# EAGLE board csew_layout_test (EAGLE 7.3.0)
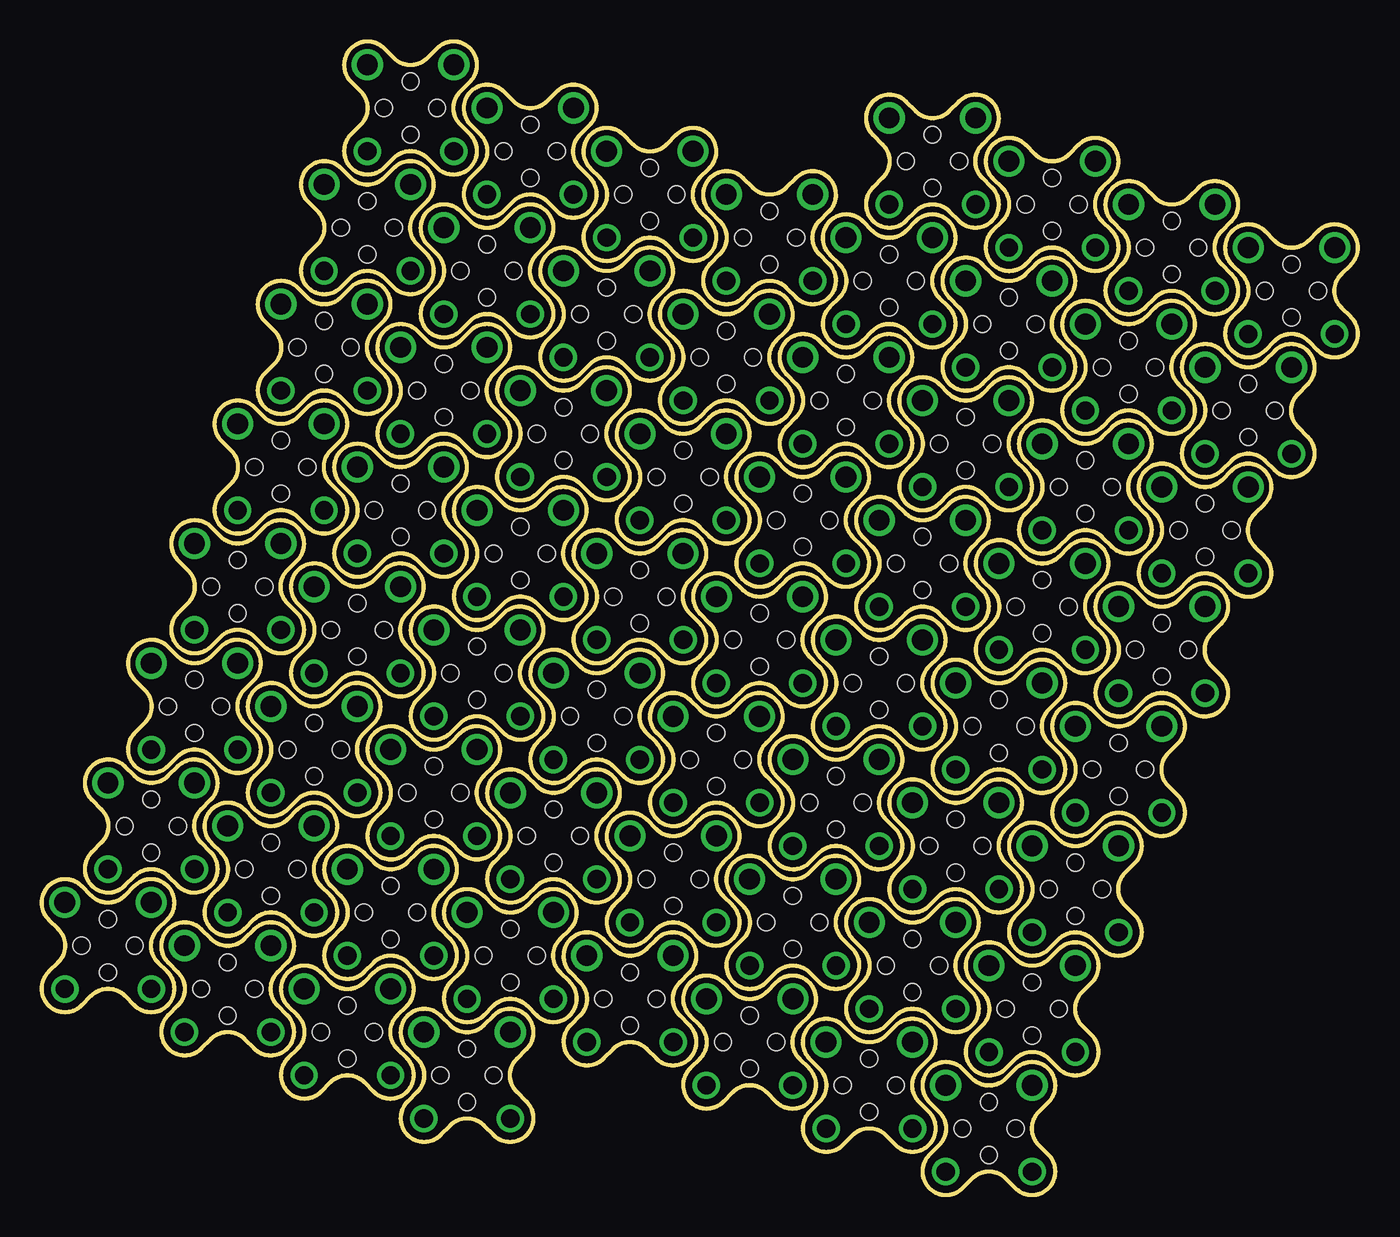
[diagram p0: board, top side]

Size 79.2 x 69.4 mm. Coordinates in mm from the lower left corner, seen from the top.
Outline: 2048 segments
Copper layers (1*16): Top 0.035mm / dielectric 1.5mm / Bottom 0.035mm
Design rules "default": minimum track width 10mil, minimum drill 24mil, track to track 8mil, track to pad 8mil, pad to pad 8mil, via to via 8mil, smd to smd 8mil, copper to edge 40mil, drill to drill 8mil, minimum pad ring 10mil, minimum via ring 8mil, stop-mask expansion 4mil, vias tented up to drill 0mil, thermal gap 10mil
Holes 1 mm at 2.4,15 5.6,15 4,16.6 4,13.4 5,22.2 8.2,22.2 6.6,23.8 6.6,20.6 9.6,12.4 12.8,12.4 11.2,14 11.2,10.8 12.2,19.6 15.4,19.6 13.8,21.2 13.8,18 7.6,29.4 10.8,29.4 9.2,31 9.2,27.8 10.2,36.6 13.4,36.6 11.8,38.2 11.8,35 14.8,26.8 18,26.8 16.4,28.4 16.4,25.2 17.4,34 20.6,34 19,35.6 19,32.4 12.8,43.8 16,43.8 14.4,45.4 14.4,42.2 15.4,51 18.6,51 17,52.6 17,49.4 20,41.2 23.2,41.2 21.6,42.8 21.6,39.6 22.6,48.4 25.8,48.4 24.2,50 24.2,46.8 18,58.2 21.2,58.2 19.6,59.8 19.6,56.6 20.6,65.4 23.8,65.4 22.2,67 22.2,63.8 25.2,55.6 28.4,55.6 26.8,57.2 26.8,54 27.8,62.8 31,62.8 29.4,64.4 29.4,61.2 16.8,9.8 20,9.8 18.4,11.4 18.4,8.2 19.4,17 22.6,17 21,18.6 21,15.4 24,7.2 27.2,7.2 25.6,8.8 25.6,5.6 26.6,14.4 29.8,14.4 28.2,16 28.2,12.8 22,24.2 25.2,24.2 23.6,25.8 23.6,22.6 24.6,31.4 27.8,31.4 26.2,33 26.2,29.8 29.2,21.6 32.4,21.6 30.8,23.2 30.8,20 31.8,28.8 35,28.8 33.4,30.4 33.4,27.2 27.2,38.6 30.4,38.6 28.8,40.2 28.8,37 29.8,45.8 33,45.8 31.4,47.4 31.4,44.2 34.4,36 37.6,36 36,37.6 36,34.4 37,43.2 40.2,43.2 38.6,44.8 38.6,41.6 32.4,53 35.6,53 34,54.6 34,51.4 35,60.2 38.2,60.2 36.6,61.8 36.6,58.6 39.6,50.4 42.8,50.4 41.2,52 41.2,48.8 42.2,57.6 45.4,57.6 43.8,59.2 43.8,56 33.8,11.8 37,11.8 35.4,13.4 35.4,10.2 36.4,19 39.6,19 38,20.6 38,17.4 41,9.2 44.2,9.2 42.6,10.8 42.6,7.6 43.6,16.4 46.8,16.4 45.2,18 45.2,14.8 39,26.2 42.2,26.2 40.6,27.8 40.6,24.6 41.6,33.4 44.8,33.4 43.2,35 43.2,31.8 46.2,23.6 49.4,23.6 47.8,25.2 47.8,22 48.8,30.8 52,30.8 50.4,32.4 50.4,29.2 44.2,40.6 47.4,40.6 45.8,42.2 45.8,39 46.8,47.8 50,47.8 48.4,49.4 48.4,46.2 51.4,38 54.6,38 53,39.6 53,36.4 54,45.2 57.2,45.2 55.6,46.8 55.6,43.6 49.4,55 52.6,55 51,56.6 51,53.4 52,62.2 55.2,62.2 53.6,63.8 53.6,60.6 56.6,52.4 59.8,52.4 58.2,54 58.2,50.8 59.2,59.6 62.4,59.6 60.8,61.2 60.8,58 48.2,6.6 51.4,6.6 49.8,8.2 49.8,5 50.8,13.8 54,13.8 52.4,15.4 52.4,12.2 55.4,4 58.6,4 57,5.6 57,2.4 58,11.2 61.2,11.2 59.6,12.8 59.6,9.6 53.4,21 56.6,21 55,22.6 55,19.4 56,28.2 59.2,28.2 57.6,29.8 57.6,26.6 60.6,18.4 63.8,18.4 62.2,20 62.2,16.8 63.2,25.6 66.4,25.6 64.8,27.2 64.8,24 58.6,35.4 61.8,35.4 60.2,37 60.2,33.8 61.2,42.6 64.4,42.6 62.8,44.2 62.8,41 65.8,32.8 69,32.8 67.4,34.4 67.4,31.2 68.4,40 71.6,40 70,41.6 70,38.4 63.8,49.8 67,49.8 65.4,51.4 65.4,48.2 66.4,57 69.6,57 68,58.6 68,55.4 71,47.2 74.2,47.2 72.6,48.8 72.6,45.6 73.6,54.4 76.8,54.4 75.2,56 75.2,52.8

## Footprints (pad centres in the part's own frame; a part is rotated, then mirrored left to right if it is on the bottom)
SML0603 = smd 0.8 x 0.8: A 0.75,0; C -0.75,0

## Placement (x,y rotation side)
LED1  [SML0603]  98,93 0 top  (outside the outline)
LED2  [SML0603]  95,91 0 top  (outside the outline)

## Library data of the parts
LED1 LED2 = led

## Tracks (layer width: path | path; a pad name or v marks a point on that pad's centre or on a via)
N$1  (via drill 1.25 pad 1.5)
  other vias: 1.4,17.6
N$2  (via drill 1.25 pad 1.5)
  other vias: 6.6,17.6
N$3  (via drill 1.1 pad 1.5)
  other vias: 1.4,12.4
N$4  (via drill 1.1 pad 1.5)
  other vias: 6.6,12.4
N$5  (via drill 1.25 pad 1.5)
  other vias: 4,24.8
N$6  (via drill 1.25 pad 1.5)
  other vias: 9.2,24.8
N$7  (via drill 1.1 pad 1.5)
  other vias: 4,19.6
N$8  (via drill 1.1 pad 1.5)
  other vias: 9.2,19.6
N$9  (via drill 1.25 pad 1.5)
  other vias: 8.6,15
N$10  (via drill 1.25 pad 1.5)
  other vias: 13.8,15
N$11  (via drill 1.1 pad 1.5)
  other vias: 8.6,9.8
N$12  (via drill 1.1 pad 1.5)
  other vias: 13.8,9.8
N$13  (via drill 1.25 pad 1.5)
  other vias: 11.2,22.2
N$14  (via drill 1.25 pad 1.5)
  other vias: 16.4,22.2
N$15  (via drill 1.1 pad 1.5)
  other vias: 11.2,17
N$16  (via drill 1.1 pad 1.5)
  other vias: 16.4,17
N$17  (via drill 1.25 pad 1.5)
  other vias: 6.6,32
N$18  (via drill 1.25 pad 1.5)
  other vias: 11.8,32
N$19  (via drill 1.1 pad 1.5)
  other vias: 6.6,26.8
N$20  (via drill 1.1 pad 1.5)
  other vias: 11.8,26.8
N$21  (via drill 1.25 pad 1.5)
  other vias: 9.2,39.2
N$22  (via drill 1.25 pad 1.5)
  other vias: 14.4,39.2
N$23  (via drill 1.1 pad 1.5)
  other vias: 9.2,34
N$24  (via drill 1.1 pad 1.5)
  other vias: 14.4,34
N$25  (via drill 1.25 pad 1.5)
  other vias: 13.8,29.4
N$26  (via drill 1.25 pad 1.5)
  other vias: 19,29.4
N$27  (via drill 1.1 pad 1.5)
  other vias: 13.8,24.2
N$28  (via drill 1.1 pad 1.5)
  other vias: 19,24.2
N$29  (via drill 1.25 pad 1.5)
  other vias: 16.4,36.6
N$30  (via drill 1.25 pad 1.5)
  other vias: 21.6,36.6
N$31  (via drill 1.1 pad 1.5)
  other vias: 16.4,31.4
N$32  (via drill 1.1 pad 1.5)
  other vias: 21.6,31.4
N$33  (via drill 1.25 pad 1.5)
  other vias: 11.8,46.4
N$34  (via drill 1.25 pad 1.5)
  other vias: 17,46.4
N$35  (via drill 1.1 pad 1.5)
  other vias: 11.8,41.2
N$36  (via drill 1.1 pad 1.5)
  other vias: 17,41.2
N$37  (via drill 1.25 pad 1.5)
  other vias: 14.4,53.6
N$38  (via drill 1.25 pad 1.5)
  other vias: 19.6,53.6
N$39  (via drill 1.1 pad 1.5)
  other vias: 14.4,48.4
N$40  (via drill 1.1 pad 1.5)
  other vias: 19.6,48.4
N$41  (via drill 1.25 pad 1.5)
  other vias: 19,43.8
N$42  (via drill 1.25 pad 1.5)
  other vias: 24.2,43.8
N$43  (via drill 1.1 pad 1.5)
  other vias: 19,38.6
N$44  (via drill 1.1 pad 1.5)
  other vias: 24.2,38.6
N$45  (via drill 1.25 pad 1.5)
  other vias: 21.6,51
N$46  (via drill 1.25 pad 1.5)
  other vias: 26.8,51
N$47  (via drill 1.1 pad 1.5)
  other vias: 21.6,45.8
N$48  (via drill 1.1 pad 1.5)
  other vias: 26.8,45.8
N$49  (via drill 1.25 pad 1.5)
  other vias: 17,60.8
N$50  (via drill 1.25 pad 1.5)
  other vias: 22.2,60.8
N$51  (via drill 1.1 pad 1.5)
  other vias: 17,55.6
N$52  (via drill 1.1 pad 1.5)
  other vias: 22.2,55.6
N$53  (via drill 1.25 pad 1.5)
  other vias: 19.6,68
N$54  (via drill 1.25 pad 1.5)
  other vias: 24.8,68
N$55  (via drill 1.1 pad 1.5)
  other vias: 19.6,62.8
N$56  (via drill 1.1 pad 1.5)
  other vias: 24.8,62.8
N$57  (via drill 1.25 pad 1.5)
  other vias: 24.2,58.2
N$58  (via drill 1.25 pad 1.5)
  other vias: 29.4,58.2
N$59  (via drill 1.1 pad 1.5)
  other vias: 24.2,53
N$60  (via drill 1.1 pad 1.5)
  other vias: 29.4,53
N$61  (via drill 1.25 pad 1.5)
  other vias: 26.8,65.4
N$62  (via drill 1.25 pad 1.5)
  other vias: 32,65.4
N$63  (via drill 1.1 pad 1.5)
  other vias: 26.8,60.2
N$64  (via drill 1.1 pad 1.5)
  other vias: 32,60.2
N$65  (via drill 1.25 pad 1.5)
  other vias: 15.8,12.4
N$66  (via drill 1.25 pad 1.5)
  other vias: 21,12.4
N$67  (via drill 1.1 pad 1.5)
  other vias: 15.8,7.2
N$68  (via drill 1.1 pad 1.5)
  other vias: 21,7.2
N$69  (via drill 1.25 pad 1.5)
  other vias: 18.4,19.6
N$70  (via drill 1.25 pad 1.5)
  other vias: 23.6,19.6
N$71  (via drill 1.1 pad 1.5)
  other vias: 18.4,14.4
N$72  (via drill 1.1 pad 1.5)
  other vias: 23.6,14.4
N$73  (via drill 1.25 pad 1.5)
  other vias: 23,9.8
N$74  (via drill 1.25 pad 1.5)
  other vias: 28.2,9.8
N$75  (via drill 1.1 pad 1.5)
  other vias: 23,4.6
N$76  (via drill 1.1 pad 1.5)
  other vias: 28.2,4.6
N$77  (via drill 1.25 pad 1.5)
  other vias: 25.6,17
N$78  (via drill 1.25 pad 1.5)
  other vias: 30.8,17
N$79  (via drill 1.1 pad 1.5)
  other vias: 25.6,11.8
N$80  (via drill 1.1 pad 1.5)
  other vias: 30.8,11.8
N$81  (via drill 1.25 pad 1.5)
  other vias: 21,26.8
N$82  (via drill 1.25 pad 1.5)
  other vias: 26.2,26.8
N$83  (via drill 1.1 pad 1.5)
  other vias: 21,21.6
N$84  (via drill 1.1 pad 1.5)
  other vias: 26.2,21.6
N$85  (via drill 1.25 pad 1.5)
  other vias: 23.6,34
N$86  (via drill 1.25 pad 1.5)
  other vias: 28.8,34
N$87  (via drill 1.1 pad 1.5)
  other vias: 23.6,28.8
N$88  (via drill 1.1 pad 1.5)
  other vias: 28.8,28.8
N$89  (via drill 1.25 pad 1.5)
  other vias: 28.2,24.2
N$90  (via drill 1.25 pad 1.5)
  other vias: 33.4,24.2
N$91  (via drill 1.1 pad 1.5)
  other vias: 28.2,19
N$92  (via drill 1.1 pad 1.5)
  other vias: 33.4,19
N$93  (via drill 1.25 pad 1.5)
  other vias: 30.8,31.4
N$94  (via drill 1.25 pad 1.5)
  other vias: 36,31.4
N$95  (via drill 1.1 pad 1.5)
  other vias: 30.8,26.2
N$96  (via drill 1.1 pad 1.5)
  other vias: 36,26.2
N$97  (via drill 1.25 pad 1.5)
  other vias: 26.2,41.2
N$98  (via drill 1.25 pad 1.5)
  other vias: 31.4,41.2
N$99  (via drill 1.1 pad 1.5)
  other vias: 26.2,36
N$100  (via drill 1.1 pad 1.5)
  other vias: 31.4,36
N$101  (via drill 1.25 pad 1.5)
  other vias: 28.8,48.4
N$102  (via drill 1.25 pad 1.5)
  other vias: 34,48.4
N$103  (via drill 1.1 pad 1.5)
  other vias: 28.8,43.2
N$104  (via drill 1.1 pad 1.5)
  other vias: 34,43.2
N$105  (via drill 1.25 pad 1.5)
  other vias: 33.4,38.6
N$106  (via drill 1.25 pad 1.5)
  other vias: 38.6,38.6
N$107  (via drill 1.1 pad 1.5)
  other vias: 33.4,33.4
N$108  (via drill 1.1 pad 1.5)
  other vias: 38.6,33.4
N$109  (via drill 1.25 pad 1.5)
  other vias: 36,45.8
N$110  (via drill 1.25 pad 1.5)
  other vias: 41.2,45.8
N$111  (via drill 1.1 pad 1.5)
  other vias: 36,40.6
N$112  (via drill 1.1 pad 1.5)
  other vias: 41.2,40.6
N$113  (via drill 1.25 pad 1.5)
  other vias: 31.4,55.6
N$114  (via drill 1.25 pad 1.5)
  other vias: 36.6,55.6
N$115  (via drill 1.1 pad 1.5)
  other vias: 31.4,50.4
N$116  (via drill 1.1 pad 1.5)
  other vias: 36.6,50.4
N$117  (via drill 1.25 pad 1.5)
  other vias: 34,62.8
N$118  (via drill 1.25 pad 1.5)
  other vias: 39.2,62.8
N$119  (via drill 1.1 pad 1.5)
  other vias: 34,57.6
N$120  (via drill 1.1 pad 1.5)
  other vias: 39.2,57.6
N$121  (via drill 1.25 pad 1.5)
  other vias: 38.6,53
N$122  (via drill 1.25 pad 1.5)
  other vias: 43.8,53
N$123  (via drill 1.1 pad 1.5)
  other vias: 38.6,47.8
N$124  (via drill 1.1 pad 1.5)
  other vias: 43.8,47.8
N$125  (via drill 1.25 pad 1.5)
  other vias: 41.2,60.2
N$126  (via drill 1.25 pad 1.5)
  other vias: 46.4,60.2
N$127  (via drill 1.1 pad 1.5)
  other vias: 41.2,55
N$128  (via drill 1.1 pad 1.5)
  other vias: 46.4,55
N$129  (via drill 1.25 pad 1.5)
  other vias: 32.8,14.4
N$130  (via drill 1.25 pad 1.5)
  other vias: 38,14.4
N$131  (via drill 1.1 pad 1.5)
  other vias: 32.8,9.2
N$132  (via drill 1.1 pad 1.5)
  other vias: 38,9.2
N$133  (via drill 1.25 pad 1.5)
  other vias: 35.4,21.6
N$134  (via drill 1.25 pad 1.5)
  other vias: 40.6,21.6
N$135  (via drill 1.1 pad 1.5)
  other vias: 35.4,16.4
N$136  (via drill 1.1 pad 1.5)
  other vias: 40.6,16.4
N$137  (via drill 1.25 pad 1.5)
  other vias: 40,11.8
N$138  (via drill 1.25 pad 1.5)
  other vias: 45.2,11.8
N$139  (via drill 1.1 pad 1.5)
  other vias: 40,6.6
N$140  (via drill 1.1 pad 1.5)
  other vias: 45.2,6.6
N$141  (via drill 1.25 pad 1.5)
  other vias: 42.6,19
N$142  (via drill 1.25 pad 1.5)
  other vias: 47.8,19
N$143  (via drill 1.1 pad 1.5)
  other vias: 42.6,13.8
N$144  (via drill 1.1 pad 1.5)
  other vias: 47.8,13.8
N$145  (via drill 1.25 pad 1.5)
  other vias: 38,28.8
N$146  (via drill 1.25 pad 1.5)
  other vias: 43.2,28.8
N$147  (via drill 1.1 pad 1.5)
  other vias: 38,23.6
N$148  (via drill 1.1 pad 1.5)
  other vias: 43.2,23.6
N$149  (via drill 1.25 pad 1.5)
  other vias: 40.6,36
N$150  (via drill 1.25 pad 1.5)
  other vias: 45.8,36
N$151  (via drill 1.1 pad 1.5)
  other vias: 40.6,30.8
N$152  (via drill 1.1 pad 1.5)
  other vias: 45.8,30.8
N$153  (via drill 1.25 pad 1.5)
  other vias: 45.2,26.2
N$154  (via drill 1.25 pad 1.5)
  other vias: 50.4,26.2
N$155  (via drill 1.1 pad 1.5)
  other vias: 45.2,21
N$156  (via drill 1.1 pad 1.5)
  other vias: 50.4,21
N$157  (via drill 1.25 pad 1.5)
  other vias: 47.8,33.4
N$158  (via drill 1.25 pad 1.5)
  other vias: 53,33.4
N$159  (via drill 1.1 pad 1.5)
  other vias: 47.8,28.2
N$160  (via drill 1.1 pad 1.5)
  other vias: 53,28.2
N$161  (via drill 1.25 pad 1.5)
  other vias: 43.2,43.2
N$162  (via drill 1.25 pad 1.5)
  other vias: 48.4,43.2
N$163  (via drill 1.1 pad 1.5)
  other vias: 43.2,38
N$164  (via drill 1.1 pad 1.5)
  other vias: 48.4,38
N$165  (via drill 1.25 pad 1.5)
  other vias: 45.8,50.4
N$166  (via drill 1.25 pad 1.5)
  other vias: 51,50.4
N$167  (via drill 1.1 pad 1.5)
  other vias: 45.8,45.2
N$168  (via drill 1.1 pad 1.5)
  other vias: 51,45.2
N$169  (via drill 1.25 pad 1.5)
  other vias: 50.4,40.6
N$170  (via drill 1.25 pad 1.5)
  other vias: 55.6,40.6
N$171  (via drill 1.1 pad 1.5)
  other vias: 50.4,35.4
N$172  (via drill 1.1 pad 1.5)
  other vias: 55.6,35.4
N$173  (via drill 1.25 pad 1.5)
  other vias: 53,47.8
N$174  (via drill 1.25 pad 1.5)
  other vias: 58.2,47.8
N$175  (via drill 1.1 pad 1.5)
  other vias: 53,42.6
N$176  (via drill 1.1 pad 1.5)
  other vias: 58.2,42.6
N$177  (via drill 1.25 pad 1.5)
  other vias: 48.4,57.6
N$178  (via drill 1.25 pad 1.5)
  other vias: 53.6,57.6
N$179  (via drill 1.1 pad 1.5)
  other vias: 48.4,52.4
N$180  (via drill 1.1 pad 1.5)
  other vias: 53.6,52.4
N$181  (via drill 1.25 pad 1.5)
  other vias: 51,64.8
N$182  (via drill 1.25 pad 1.5)
  other vias: 56.2,64.8
N$183  (via drill 1.1 pad 1.5)
  other vias: 51,59.6
N$184  (via drill 1.1 pad 1.5)
  other vias: 56.2,59.6
N$185  (via drill 1.25 pad 1.5)
  other vias: 55.6,55
N$186  (via drill 1.25 pad 1.5)
  other vias: 60.8,55
N$187  (via drill 1.1 pad 1.5)
  other vias: 55.6,49.8
N$188  (via drill 1.1 pad 1.5)
  other vias: 60.8,49.8
N$189  (via drill 1.25 pad 1.5)
  other vias: 58.2,62.2
N$190  (via drill 1.25 pad 1.5)
  other vias: 63.4,62.2
N$191  (via drill 1.1 pad 1.5)
  other vias: 58.2,57
N$192  (via drill 1.1 pad 1.5)
  other vias: 63.4,57
N$193  (via drill 1.25 pad 1.5)
  other vias: 47.2,9.2
N$194  (via drill 1.25 pad 1.5)
  other vias: 52.4,9.2
N$195  (via drill 1.1 pad 1.5)
  other vias: 47.2,4
N$196  (via drill 1.1 pad 1.5)
  other vias: 52.4,4
N$197  (via drill 1.25 pad 1.5)
  other vias: 49.8,16.4
N$198  (via drill 1.25 pad 1.5)
  other vias: 55,16.4
N$199  (via drill 1.1 pad 1.5)
  other vias: 49.8,11.2
N$200  (via drill 1.1 pad 1.5)
  other vias: 55,11.2
N$201  (via drill 1.25 pad 1.5)
  other vias: 54.4,6.6
N$202  (via drill 1.25 pad 1.5)
  other vias: 59.6,6.6
N$203  (via drill 1.1 pad 1.5)
  other vias: 54.4,1.4
N$204  (via drill 1.1 pad 1.5)
  other vias: 59.6,1.4
N$205  (via drill 1.25 pad 1.5)
  other vias: 57,13.8
N$206  (via drill 1.25 pad 1.5)
  other vias: 62.2,13.8
N$207  (via drill 1.1 pad 1.5)
  other vias: 57,8.6
N$208  (via drill 1.1 pad 1.5)
  other vias: 62.2,8.6
N$209  (via drill 1.25 pad 1.5)
  other vias: 52.4,23.6
N$210  (via drill 1.25 pad 1.5)
  other vias: 57.6,23.6
N$211  (via drill 1.1 pad 1.5)
  other vias: 52.4,18.4
N$212  (via drill 1.1 pad 1.5)
  other vias: 57.6,18.4
N$213  (via drill 1.25 pad 1.5)
  other vias: 55,30.8
N$214  (via drill 1.25 pad 1.5)
  other vias: 60.2,30.8
N$215  (via drill 1.1 pad 1.5)
  other vias: 55,25.6
N$216  (via drill 1.1 pad 1.5)
  other vias: 60.2,25.6
N$217  (via drill 1.25 pad 1.5)
  other vias: 59.6,21
N$218  (via drill 1.25 pad 1.5)
  other vias: 64.8,21
N$219  (via drill 1.1 pad 1.5)
  other vias: 59.6,15.8
N$220  (via drill 1.1 pad 1.5)
  other vias: 64.8,15.8
N$221  (via drill 1.25 pad 1.5)
  other vias: 62.2,28.2
N$222  (via drill 1.25 pad 1.5)
  other vias: 67.4,28.2
N$223  (via drill 1.1 pad 1.5)
  other vias: 62.2,23
N$224  (via drill 1.1 pad 1.5)
  other vias: 67.4,23
N$225  (via drill 1.25 pad 1.5)
  other vias: 57.6,38
N$226  (via drill 1.25 pad 1.5)
  other vias: 62.8,38
N$227  (via drill 1.1 pad 1.5)
  other vias: 57.6,32.8
N$228  (via drill 1.1 pad 1.5)
  other vias: 62.8,32.8
N$229  (via drill 1.25 pad 1.5)
  other vias: 60.2,45.2
N$230  (via drill 1.25 pad 1.5)
  other vias: 65.4,45.2
N$231  (via drill 1.1 pad 1.5)
  other vias: 60.2,40
N$232  (via drill 1.1 pad 1.5)
  other vias: 65.4,40
N$233  (via drill 1.25 pad 1.5)
  other vias: 64.8,35.4
N$234  (via drill 1.25 pad 1.5)
  other vias: 70,35.4
N$235  (via drill 1.1 pad 1.5)
  other vias: 64.8,30.2
N$236  (via drill 1.1 pad 1.5)
  other vias: 70,30.2
N$237  (via drill 1.25 pad 1.5)
  other vias: 67.4,42.6
N$238  (via drill 1.25 pad 1.5)
  other vias: 72.6,42.6
N$239  (via drill 1.1 pad 1.5)
  other vias: 67.4,37.4
N$240  (via drill 1.1 pad 1.5)
  other vias: 72.6,37.4
N$241  (via drill 1.25 pad 1.5)
  other vias: 62.8,52.4
N$242  (via drill 1.25 pad 1.5)
  other vias: 68,52.4
N$243  (via drill 1.1 pad 1.5)
  other vias: 62.8,47.2
N$244  (via drill 1.1 pad 1.5)
  other vias: 68,47.2
N$245  (via drill 1.25 pad 1.5)
  other vias: 65.4,59.6
N$246  (via drill 1.25 pad 1.5)
  other vias: 70.6,59.6
N$247  (via drill 1.1 pad 1.5)
  other vias: 65.4,54.4
N$248  (via drill 1.1 pad 1.5)
  other vias: 70.6,54.4
N$249  (via drill 1.25 pad 1.5)
  other vias: 70,49.8
N$250  (via drill 1.25 pad 1.5)
  other vias: 75.2,49.8
N$251  (via drill 1.1 pad 1.5)
  other vias: 70,44.6
N$252  (via drill 1.1 pad 1.5)
  other vias: 75.2,44.6
N$253  (via drill 1.25 pad 1.5)
  other vias: 72.6,57
N$254  (via drill 1.25 pad 1.5)
  other vias: 77.8,57
N$255  (via drill 1.1 pad 1.5)
  other vias: 72.6,51.8
N$256  (via drill 1.1 pad 1.5)
  other vias: 77.8,51.8